# EAGLE board Power Supply (EAGLE 7.2.0)
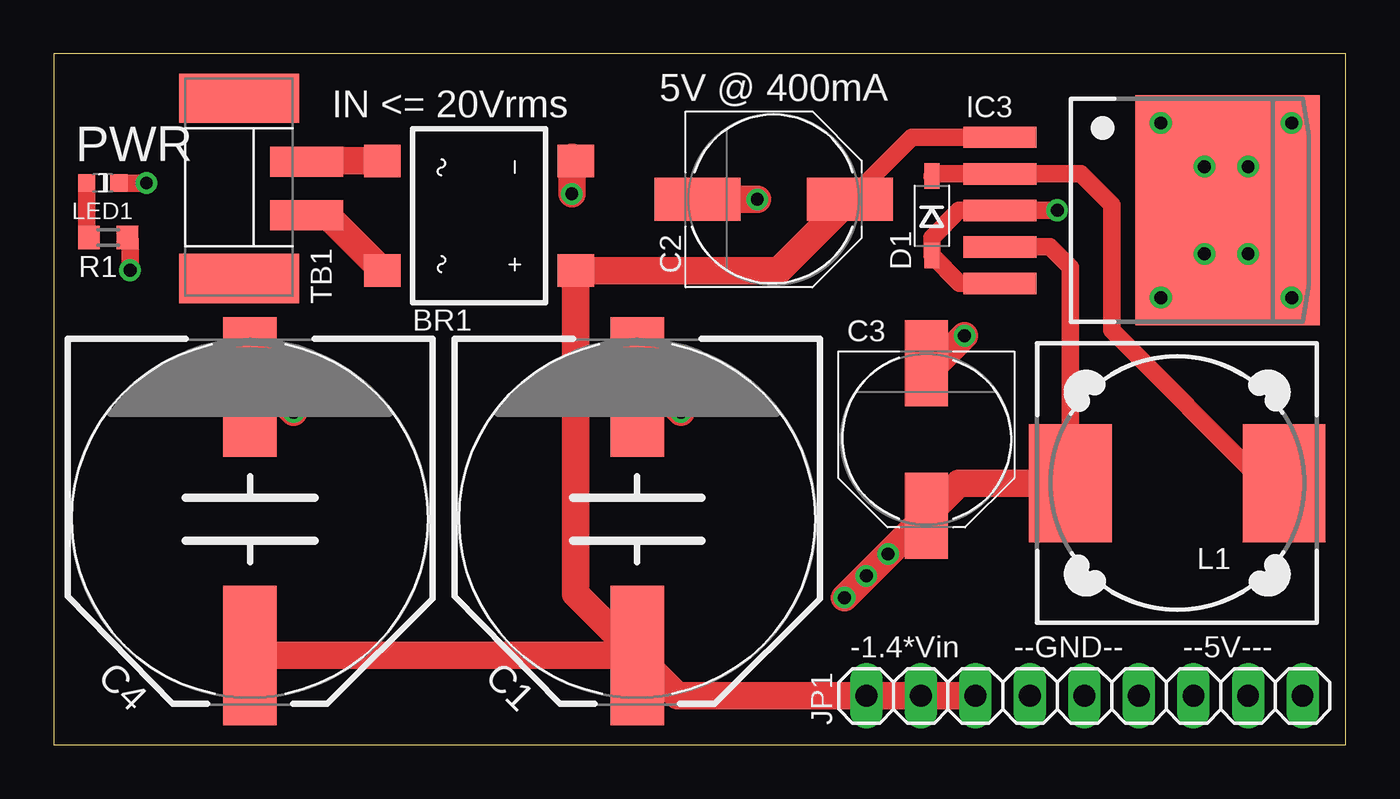
[diagram p0: board, top side]
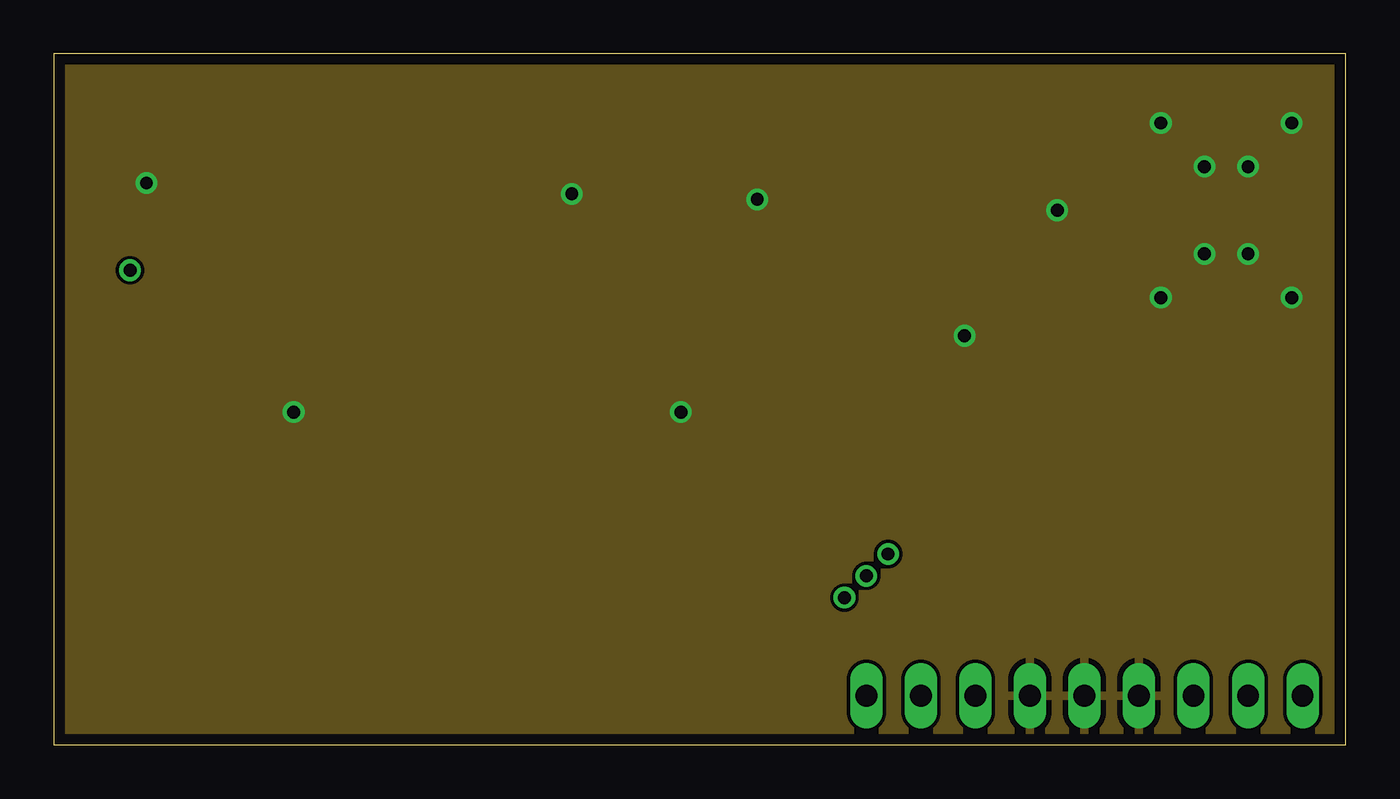
[diagram p1: board, inner layer GND]
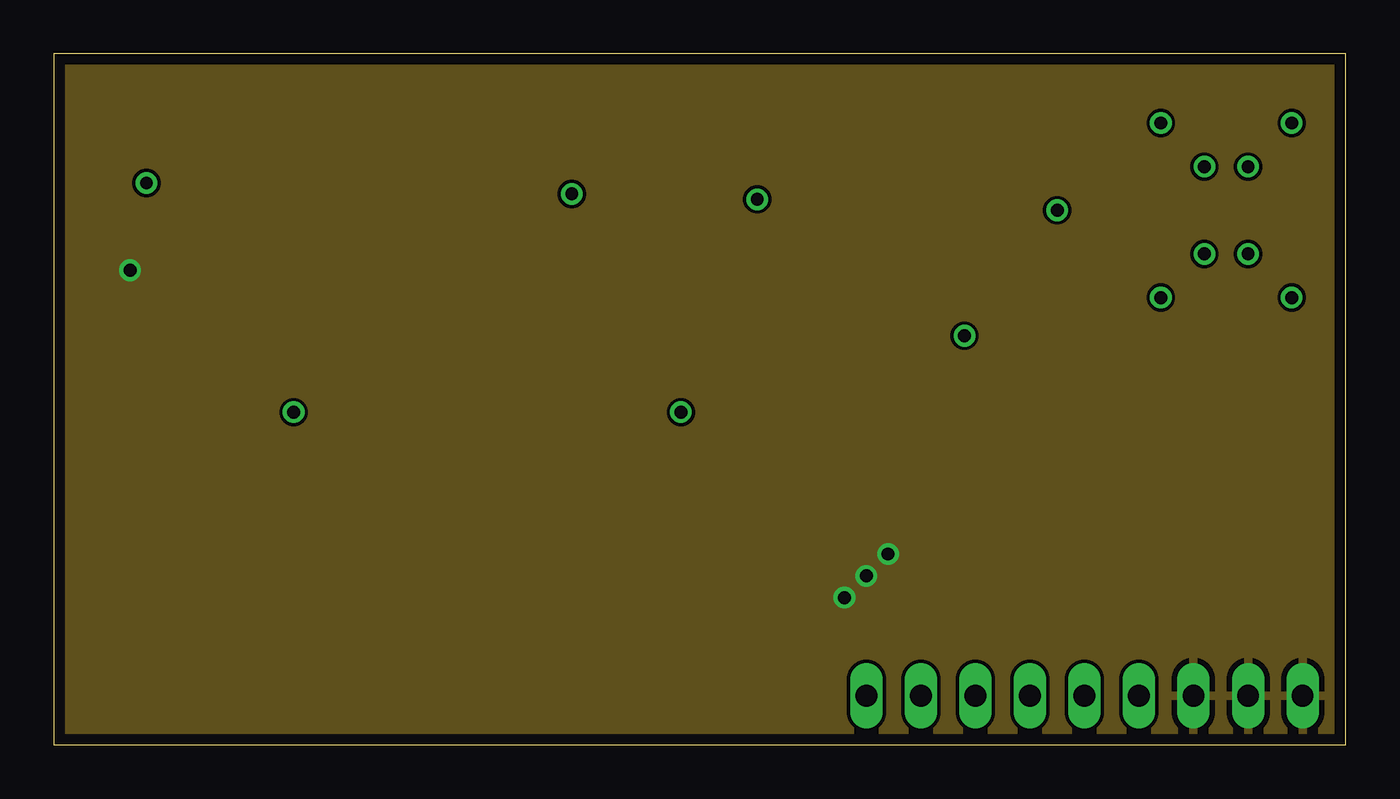
[diagram p2: board, inner layer +5V]

Size 60.18 x 32.18 mm. Coordinates in mm from the lower left corner, seen from the top.
Outline: 0,0 60.18,0 60.18,32.18 0,32.18 0,0
Copper layers (1+2*15+16): Top 0.0178mm / dielectric 12mil / GND 0.0356mm / dielectric 28mil / +5V 0.0356mm / dielectric 12mil / Bottom 0.0178mm
Design rules "SSC-EAGLE-4Lyr_v1.0.0.3": minimum track width 6mil, minimum drill 8mil, track to track 6mil, track to pad 6mil, pad to pad 6mil, via to via 6mil, smd to smd 6mil, copper to edge 20mil, drill to drill 16mil, minimum pad ring 8mil, minimum via ring 8mil, stop-mask expansion 3mil, vias tented up to drill 0mil, thermal gap 10mil

## Footprints (pad centres in the part's own frame; a part is rotated, then mirrored left to right if it is on the bottom)
DFS = smd 1.7 x 1.5: + -4.5,2.55; - -4.5,-2.55; AC1 4.5,2.55; AC2 4.5,-2.55
J16_CAP = smd 6.5 x 2.5: + 6.248,0; - -6.252,0
F_CAP = smd 4 x 2: + 3.55,0; - -3.55,0
SMD_DIODE = smd 1.2 x 0.7: A 1.85,0; C -1.85,0
TO-263-5 = smd 1 x 3.4: 1 -3.4,-8; 2 -1.7,-8; 3 0,-8; 4 1.7,-8; 5 3.4,-8 | smd 10.7 x 8.6: TAB 0,2.6
1X09 = drill 1.016 long: 1 -10.16,0; 2 -7.62,0; 3 -5.08,0; 4 -2.54,0; 5 0,0; 6 2.54,0; 7 5.08,0; 8 7.62,0; 9 10.16,0
DR125 = smd 3.85 x 5.5: 1 -4.975,0; 2 4.975,0
0603_LED = smd 0.8 x 0.8: A 0.75,0; C -0.75,0
0603_RESISTOR = smd 1 x 1.1: 1 -0.9,0; 2 0.9,0
TERMINAL_BLOCK_2 = smd 1.4 x 3.4: 1 1.25,-3.15; 2 -1.25,-3.15 | smd 2.3 x 5.6: P$1 4.2,0; P$2 -4.2,0

## Placement (x,y rotation side)
BR1  [DFS]  19.81,24.64 180 top
C1  1500uF  [J16_CAP]  27.18,10.41 270 top
C2  100uF  [F_CAP]  33.53,25.4 0 top
C3  330uF  [F_CAP]  40.64,14.22 270 top
C4  1500uF  [J16_CAP]  9.14,10.41 270 top
D1  [SMD_DIODE]  40.89,24.64 270 top
IC3  TL2575HV-05IKTTR  [TO-263-5]  52.07,24.89 270 top
JP1  [1X09]  48.01,2.29 0 top
L1  680 uH  [DR125]  52.32,12.19 180 top
LED1  GRN  [0603_LED]  2.29,26.16 180 top
R1  680  [0603_RESISTOR]  2.54,23.62 0 top
TB1  TERMINAL_BLOCK_2  [TERMINAL_BLOCK_2]  8.64,25.91 90 top

## Library data of the parts
BR1 = jkf; DIGIKEY#: 641-1425-1-ND; MANF: Comchip Technology; MANF#: DF206ST-G
C1-C4 R1 = jkf
D1 = jkf; DIGIKEY#: 1N5819HW-FDICT-ND; MANF: Diodes Inc; MANF#: 1N5819HW-7-F
IC3 = jkf; DIGIKEY#: 296-21828-1-ND; MANF: Texas Instruments; MANF#: TL2575-33IKTTR
JP1 = pinhead
L1 = jkf; DIGIKEY#: SRR1208-102KLCT-ND; MANF: Bourns Inc.; MANF#: SRR1208-102KL
LED1 = jkf; DIGIKEY#: 516-2493-1-ND; MANF: Avago Technologies; MANF#: HSMG-C191
TB1 = jkf; DIGIKEY#: 277-2072-1-ND; MANF: Phoenix; MANF#: 1771091

## Nets
+5V: C3.+ IC3.4 JP1.7 JP1.8 JP1.9 L1.2 R1.2
GND: BR1.- C1.- C2.- C3.- C4.- D1.A IC3.3 IC3.5 JP1.4 JP1.5 JP1.6 LED1.C
N$32: D1.C IC3.2 L1.1
N$38: LED1.A R1.1
TRANS1: BR1.AC2 TB1.1
TRANS2: BR1.AC1 TB1.2
VCC: BR1.+ C1.+ C2.+ C4.+ IC3.1 JP1.1 JP1.2 JP1.3

## Tracks (layer width: path | path; a pad name or v marks a point on that pad's centre or on a via)
+5V  (via drill 0.6)
  Top 0.813: IC3.4 46.4,23.19 47.35,22.25 L1.2 | R1.2 3.56,23.51 v3.56,22.1
  Top 1.27: v36.83,6.86 C3.+ 42.16,12.19 L1.2
  other vias: 37.85,7.87 38.86,8.89
  pour +5V: 0,0 0,32.26 60.2,32.26 60.2,0
GND  (via drill 0.6)
  Top 0.813: IC3.5 42.19,21.49 D1.A 40.89,23.62 42.16,24.89 IC3.3 v46.74,24.89 | LED1.C v4.32,26.16
  Top 1.27: C1.- 27.18,17.53 v29.21,15.49 | C4.- 9.14,17.53 v11.18,15.49 | C3.- 41.14,17.77 v42.42,19.05 | C2.- v32.77,25.4 | BR1.- 24.13,27.37 v24.13,25.65
  other vias: 51.56,20.83 53.59,22.86 55.63,22.86 57.66,20.83 55.63,26.92 53.59,26.92 51.56,28.96 57.66,28.96
  pour GND: 0,32.26 60.2,32.26 60.2,0 0,0
N$32
  Top 0.813: D1.C 41,26.59 IC3.2 47.83,26.59 49.28,25.15 49.28,19.3 56.39,12.19 L1.1
N$38
  Top 0.813: LED1.A 1.54,23.73 R1.1
TRANS1
  Top 1.27: TB1.1 11.82,27.19 BR1.AC2
TRANS2
  Top 1.27: BR1.AC1 12.74,24.66 TB1.2
VCC
  Top 0.813: C2.+ 39.97,28.29 IC3.1
  Top 1.27: C4.+ C1.+ | C1.+ 29.06,2.29 JP1.1 JP1.2 JP1.3 | C1.+ 24.31,7.03 BR1.+ 33.77,22.09 C2.+

## Text on the board
tNames: 5V @ 400mA | IN <= 20Vrms | PWR | -1.4*Vin | --GND-- | --5V---